# Altium PCB Mestrado_Roger_2mm.PcbDoc
Units mm, origin at the board's own origin, x right, y up, seen from the top; angles counter-clockwise.
Board outline 15 x 30 mm, 2 copper layers (Top Layer, Bottom Layer), stack 1.57 mm thick; 16 components, 11 nets, 35 pads, 8 vias.
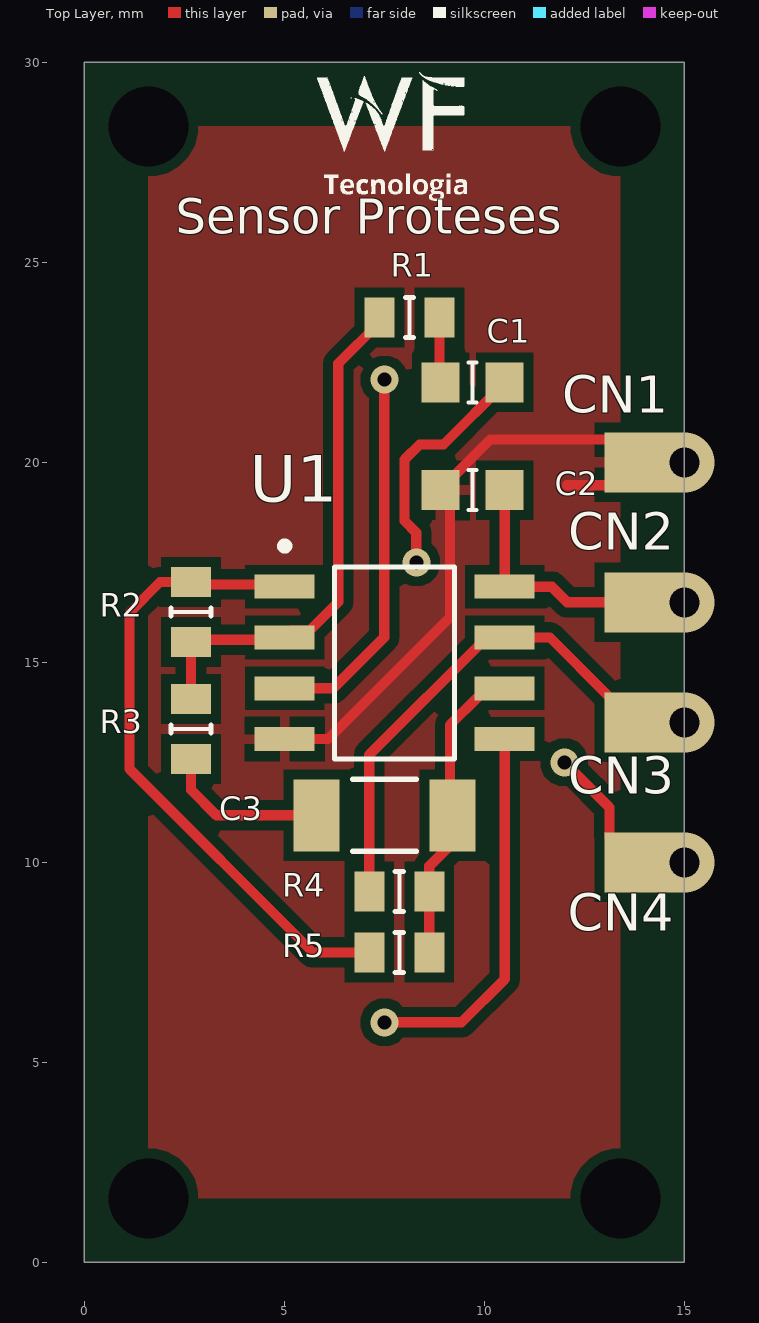
[diagram p0: Top Layer view]
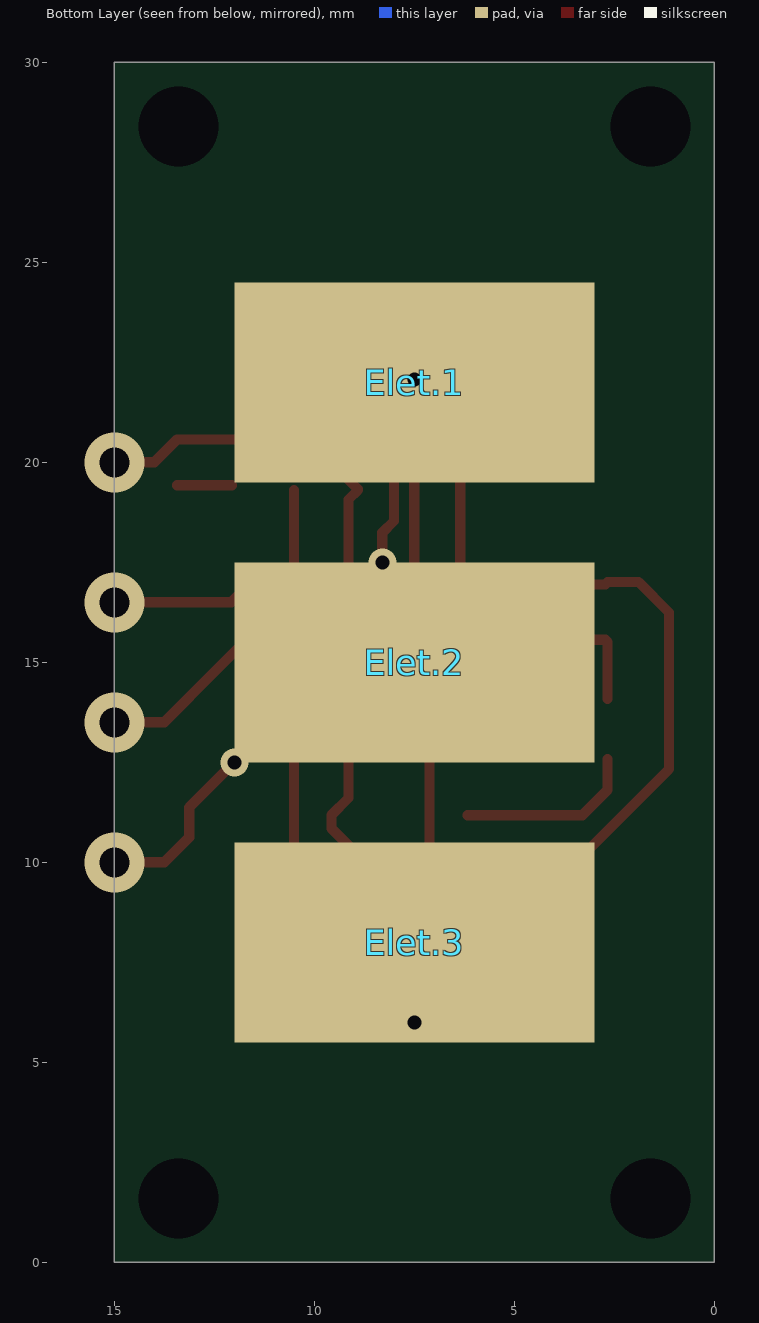
[diagram p1: Bottom Layer view, seen from below]
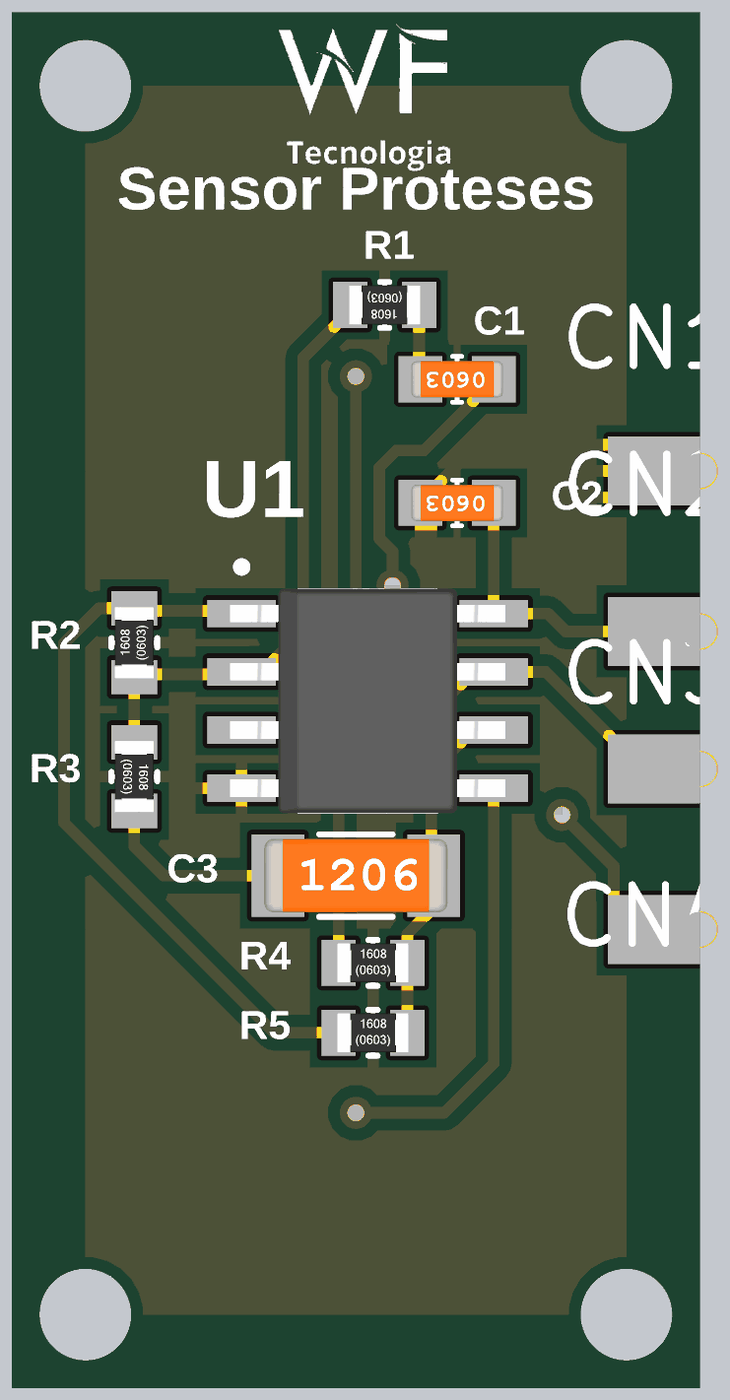
[diagram p2: 3D render of the assembled board from above, using the file's embedded part models]

## Layer stack, top to bottom
Top Solder: solder mask 0.0102, Solder Resist, Dk 3.5
Top Layer: signal copper 0.0356
Dielectric 1: core 1.4986, Core-043, Dk 4.3
Bottom Layer: signal copper 0.0356
Bottom Solder: solder mask 0.0102, Solder Resist, Dk 3.5

## Board outline
0,0 0,30 15,30 15,0

## Design rules (kind name [scope] priority, off if disabled: settings)
Clearance [All] p1: gap=0.254 ignorepadtopadclearanceinfootprint=FALSE except(0: Arc-Hole Track-Hole SMDPad-Hole THPad-Hole Via-Hole Fill-Hole Poly-Hole Region-Hole Text-Hole)
PolygonConnect [All] p1: connectstyle=Relief reliefconductorwidth=0.254 reliefentries=4 polygonreliefangle="90 Angle" airgapwidth=0.254
RoutingVias [All] p1: holewidth=0.711 width=1.27 viastyle="Through Hole" minholewidth=0.711 minwidth=1.27 maxholewidth=0.711 maxwidth=1.27
SilkToSolderMaskClearance [IsPad] p1: minsilkscreentomaskgap=0.17 clearancetoexposedcopper=TRUE
SolderMaskExpansion [All] p1: expansion=0.102 istentingtop=FALSE
Width [All] p1: maxlimit=0.254 minlimit=0.254 preferedwidth=0.254
29 further rules are at their usual default settings.

## Classes and differential pairs
component class Mestrado_Roger: C2 CN1 CN3 Elet.1 Elet.2 Elet.3 R1 R2 R5 U1

## Components (designator, comment, footprint, x,y, rotation, side; value= is the part's Value field where it differs from the comment)
C1 "27nF" SMD_C_0603 9.709,22 r180 top
C2 "100nF" SMD_C_0603 9.709,19.304 r180 top
C3 "100uF_X5R" SMD_C_1206 7.5,11.176 r0 top
CN1 "Pad" Pad#1 13.889,22.893 r0 top
CN2 "Pad" Pad#2 13.889,19.685 r180 top
CN3 "Pad" Pad#3 13.889,15.575 r180 top
CN4 "Pad" Pad#4 13.859,10.289 r180 top
Elet.1 "Circuito_Eletroudo" ELETROUDO#1 7.5,24 r0 bottom
Elet.2 "Circuito_Eletroudo" ELETROUDO#2 7.5,14.351 r0 bottom
Elet.3 "Circuito_Eletroudo" ELETROUDO#3 7.5,5 r0 bottom
R1 "330k" SMD_R0603_F 8.128,23.622 r180 top
R2 "220k" SMD_R0603_F 2.667,16.256 r90 top
R3 "220R" SMD_R0603_F 2.667,13.335 r270 top
R4 "330k" SMD_R0603_F 7.874,9.271 r0 top
R5 "220k" SMD_R0603_F 7.874,7.747 r0 top
U1 "LM358ADT" SOIC-8 7.759,14.986 r0 top

## Footprints (in the part's own frame and the unit in brackets; to place one, negate y for a bottom-side part, rotate by r counter-clockwise, add the part's x,y. Pads: shape width x height; smd on the part's side, far side on the other; paste and mask are expansions set on the pad)
ELETROUDO#1 [mm]
  rect 9x5 smd mask+0.127: 0(0,2)
ELETROUDO#2 [mm]
  rect 9x5 smd mask+0.127: 0(0,-0.649)
ELETROUDO#3 [mm]
  rect 9x5 smd mask+0.127: 0(0,-3)
Pad#1 [mm]
  rect 2x1.5 smd: 0(0.111,-2.893)
Pad#2 [mm]
  rect 2x1.5 smd: 0(-0.111,3.185)
Pad#3 [mm]
  rect 2x1.5 smd: 0(-0.111,2.075)
Pad#4 [mm]
  rect 2x1.5 smd: 0(-0.141,0.289)
SMD_C_0603 [mm]
  rect 0.95x1 smd: 1(-0.8,0) 2(0.8,0)
  silkscreen extent -0.1,-0.5 0.1,0.5, body extent -1,-0.39 1,0.39, height 0.79
SMD_C_1206 [mm]
  rect 1.15x1.8 smd: 1(-1.7,0) 2(1.7,0)
  silkscreen extent -0.8,-0.9 0.8,0.9, body extent -2,-0.8 2,0.8, height 1.53
SMD_R0603_F [mm]
  rect 0.75x1 smd: 1(-0.75,0) 2(0.75,0)
  silkscreen extent -0.1,-0.5 0.1,0.5, body extent -0.77,-0.42 0.77,0.43, height 0.45
SOIC-8 [mm]
  rect 1.5x0.6 smd: 1(-2.75,1.905) 2(-2.75,0.635) 3(-2.75,-0.635) 4(-2.75,-1.905) 5(2.75,-1.905) 6(2.75,-0.635) 7(2.75,0.635) 8(2.75,1.905)
  silkscreen extent -2.81,-2.4 1.5,2.98, body extent -3,-2.45 3,2.45, height 1.62

## Part data
C1: library part Cap_Cer._0.027uF_10%_25V_SMD(0603), "0.027 µF ±10% 25V Ceramic Capacitor X7R 0603 (1608 Metric)", Manufacturer="Cal-Chip Electronics, Inc.", Part Number=GMC10X7R273K25NT, Supplier Part Number 1=2571-GMC10X7R273K25NTTR-ND, ComponentLink1Description="Datasheet 1", ComponentLink1URL=https://calchip.com/wp-content/uploads/2023/09/GMC-Series-2.pdf, Size=0603, Supplier 1=Digi-Key, Type=SMD
C2: library part Cap_Cer._100nF_10%_50V_SMD(0603), "0.1 µF ±10% 50V Ceramic Capacitor X7R 0603 (1608 Metric)", Manufacturer="TDK Corporation", Part Number=C1608X7R1H104K080AA, Supplier Part Number 1=445-1314-2-ND, CDM=C10416, ComponentLink1Description="Datasheet 1", ComponentLink1URL=https://product.tdk.com/system/files/dam/doc/product/capacitor/ceramic/mlcc/catalog/mlcc_commercial_general_en.pdf, Size=0603, Supplier 1=Digi-Key, Type=SMD
C3: library part Cap_Cer._100uF_20%_4V_SMD(0805), "100 µF ±20% 4V Ceramic Capacitor X5R 0805 (2012 Metric)", Manufacturer="Murata Electronics", Part Number=GRM21BR60G107ME11L, Supplier Part Number 1=490-13980-2-ND, ComponentLink1Description="Datasheet 1", ComponentLink1URL=https://search.murata.co.jp/Ceramy/image/img/A01X/G101/ENG/GRM21BR60G107ME11-01.pdf, Size=0805, Supplier 1=Digi-Key, Type=SMD
R1 R4: library part RES_330k_1%_0.1W_SMD(0603), "330 kOhms ±1% 0.1W, 1/10W Chip Resistor 0603 (1608 Metric) Moisture Resistant Thick Film", Manufacturer=YAGEO, Part Number=RC0603FR-07330KL, Supplier Part Number 1=311-330KHRTR-ND, CDM=C12147, ComponentLink1Description=DataSheet, ComponentLink1URL=https://www.yageo.com/upload/media/product/app/datasheet/rchip/pyu-rc_group_51_rohs_l.pdf, Size=0603, Supplier 1=Digi-Key, Type=SMD
R2 R5: library part RES_220k_1%_0.1W_SMD(0603), "220 kOhms ±1% 0.1W, 1/10W Chip Resistor 0603 (1608 Metric) Moisture Resistant Thick Film", Manufacturer=YAGEO, Part Number=RC0603FR-07220KL, Supplier Part Number 1=311-220KHRTR-ND, CDM=C10444, ComponentLink1Description=DataSheet, ComponentLink1URL=https://www.yageo.com/upload/media/product/app/datasheet/rchip/pyu-rc_group_51_rohs_l.pdf, Size=0603, Supplier 1=Digi-Key, Type=SMD
R3: library part RES_220R_1%_0.1W_SMD(0603), "220 Ohms ±1% 0.1W, 1/10W Chip Resistor 0603 (1608 Metric) Moisture Resistant Thick Film", Manufacturer=YAGEO, Part Number=RC0603FR-07220RL, Supplier Part Number 1=311-220HRTR-ND, CDM=C10420, ComponentLink1Description=DataSheet, ComponentLink1URL=https://www.yageo.com/upload/media/product/productsearch/datasheet/rchip/PYu-RC_Group_51_RoHS_L_12.pdf, Size=0603, Supplier 1=Digi-Key, Type=SMD
U1: library part Amp_LM358ADT, "Uso geral Amplificador 2 Circuito 8-SOIC", Manufacturer=STMicroelectronics, Supplier Part Number 1=497-1590-2-ND, CDM=C12452, ComponentLink1Description="Datasheet 1", ComponentLink1URL=https://www.st.com/content/ccc/resource/technical/document/datasheet/61/46/87/01/98/ed/44/c5/CD00000464.pdf/files/CD00000464.pdf/jcr:content/translations/en.CD00000464.pdf, Part Number=LM358ADT, Size=SOIC-8, Supplier 1=Digi-Key, Type=SMD

## Free pads (board coordinates)
  round 1.524 hole 2 unplated: 1(1.6,1.6) 2(13.4,1.6) 3(13.4,28.4) 4(1.6,28.4)

## Via types
v1: diameter 1.5, hole 0.75, Top Layer to Bottom Layer, tented bottom, 4 vias
v2: diameter 0.7, hole 0.35, Top Layer to Bottom Layer, tented top, 4 vias

## Nets (pads, with @x,y where several pads share a name; then routed paths per layer and width w, separated by ;. In a path a pad name is that pad's centre, name@x,y a point inside that pad or via, vN(x,y) a via of type N, cw(c..) or ccw(c..) an arc to the next point about the centre after c; other vN are vias at no path point)
GND: C2.2 CN1.0 U1.4 | length 16.9
  Top Layer w0.254: U1.4 6.096,13.081 9.144,16.129 9.144,19.069 C2.2 8.909,19.329 10.154,20.574 13.426,20.574 CN1.0 v1(15,20) ; 12.065,19.426 CN1.0@13.426,19.426
NetC1_1: C3.1 R3.2 | length 4.5
  Top Layer w0.254: R3.2 2.667,11.811 3.302,11.176 C3.1@6.174,11.176
NetC1_2: C3.2 R4.2 R5.2 U1.6 | length 8
  Top Layer w0.254: R5.2 R4.2 8.624,9.901 9.574,10.851 9.574,11.176 9.144,11.606 9.144,13.436 9.886,14.178 10.059,14.351 U1.6
NetC2_2: C1.2 R1.1 | length 1.6
  Top Layer w0.254: R1.1 8.878,22.031 C1.2
NetElet.1_0: Elet.1.0 U1.3 | length 9.5
  Top Layer w0.254: U1.3 6.223,14.351 7.5,15.628 v2(7.5,22.065)
NetElet.3_0: Elet.3.0 U1.5 | length 9.5
  Top Layer w0.254: v2(7.5,6) 9.429,6 10.509,7.08 U1.5
NetR1_1: R1.2 R2.1 R3.1 U1.2 | length 13.1
  Top Layer w0.254: R3.1 R2.1 2.725,15.563 4.951,15.563 5.182,15.794 5.634,15.794 6.35,16.51 6.35,22.469 7.378,23.497 R1.2
NetR2_2: R2.2 R5.1 U1.1 | length 16
  Top Layer w0.254: U1.1 4.951,16.949 2.725,16.949 R2.2 1.893,17.006 1.133,16.246 1.133,12.329 5.715,7.747 R5.1
Ref.: C1.1 CN4.0 Elet.2.0 | length 10.5
  Top Layer w0.254: v2(8.3,17.5) 8.3,18.243 8.008,18.535 8.008,20.073 8.382,20.447 8.981,20.447 10.509,21.975 C1.1 ; v2(12,12.5) 13.127,11.373 13.127,10.623 13.75,10 CN4.0 v1(15,10)
VCC: C2.1 CN2.0 U1.8 | length 7.1
  Top Layer w0.254: C2.1 U1.8 11.684,16.891 12.075,16.5 CN2.0 v1(15,16.5)
VOUT: CN3.0 R4.1 U1.7 | length 13.4
  Top Layer w0.254: R4.1 7.124,12.686 10.059,15.621 U1.7 11.64,15.621 13.127,14.134 13.127,14.123 13.75,13.5 CN3.0 v1(15,13.5)

## Polygon pours and split planes (outlines as drawn)
GND on Top Layer "GND_L01_P000" (solid, pour order 0): 1.6,1.6 1.6,28.4 13.4,28.4 13.4,1.6

## Silkscreen, mask and mechanical layers (free items; w line width, h text height)
Top Overlay:
  drawing of 20 lines, arcs and shapes, not listed
  text "Sensor Proteses" at 2.286,25.428 h1.5
Mechanical 1:
  the board outline again, w0.254